# EAGLE board first (EAGLE 8.7.1)
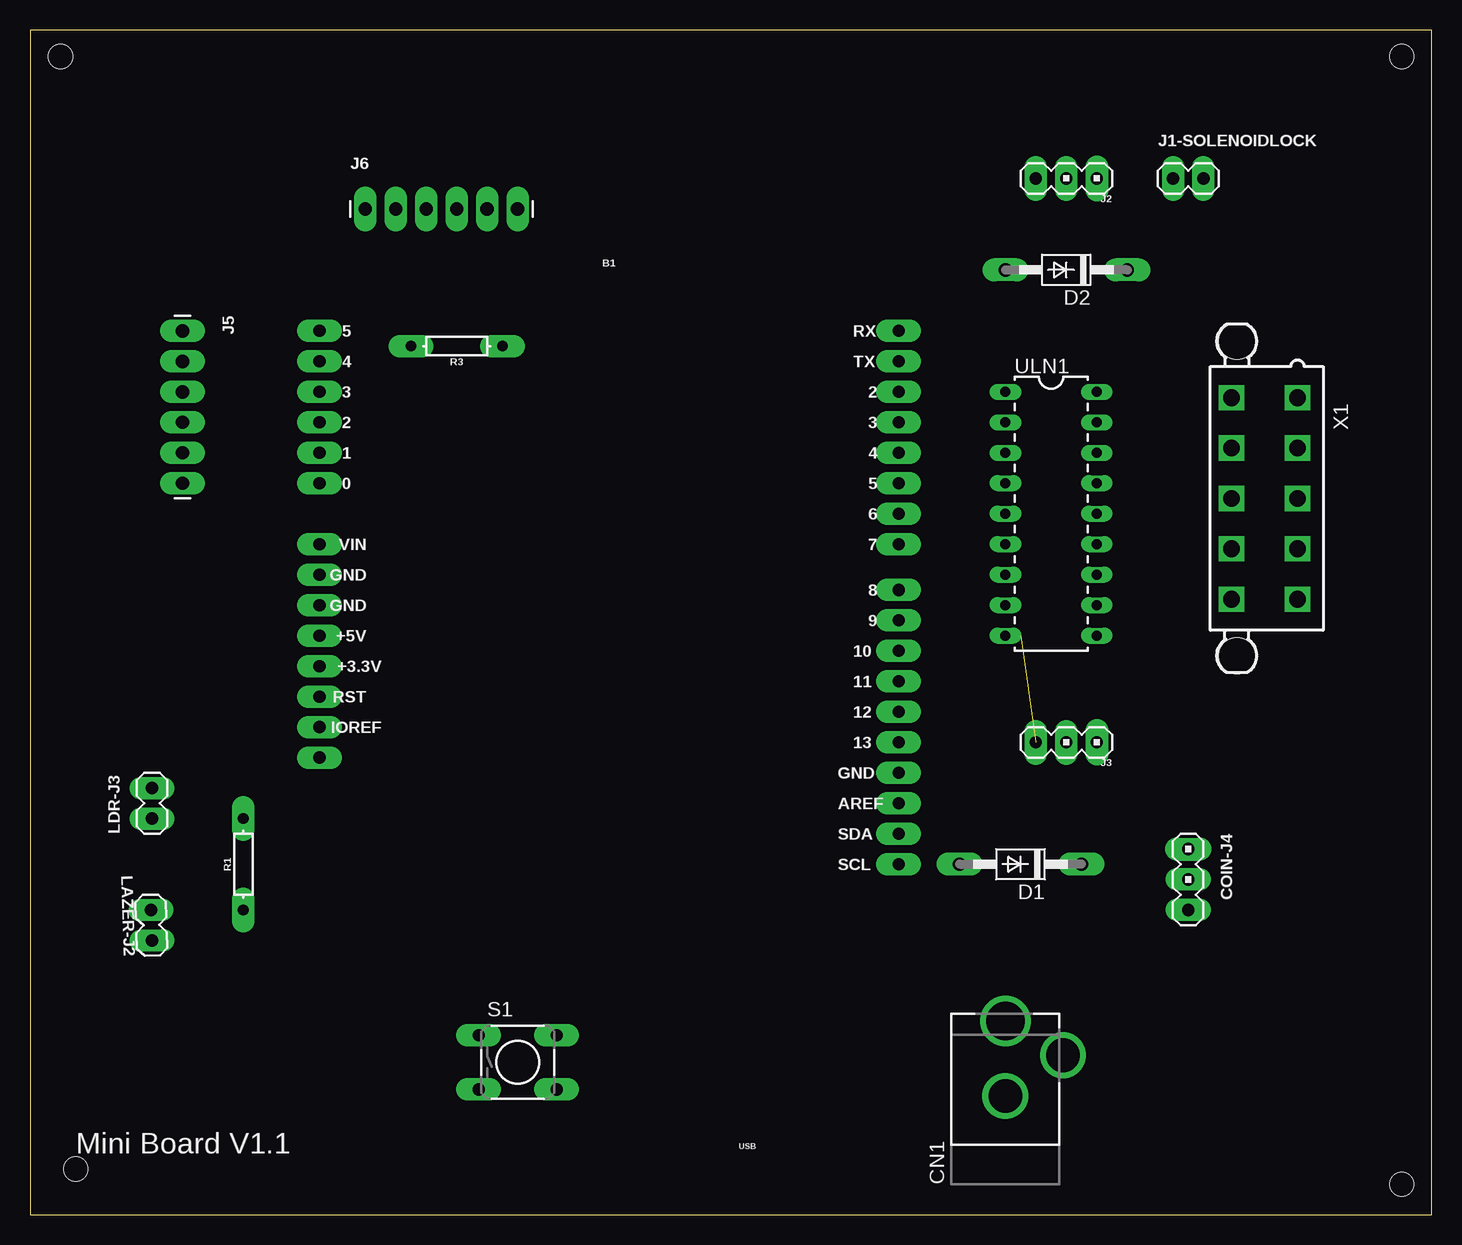
[diagram p0: board, top side]
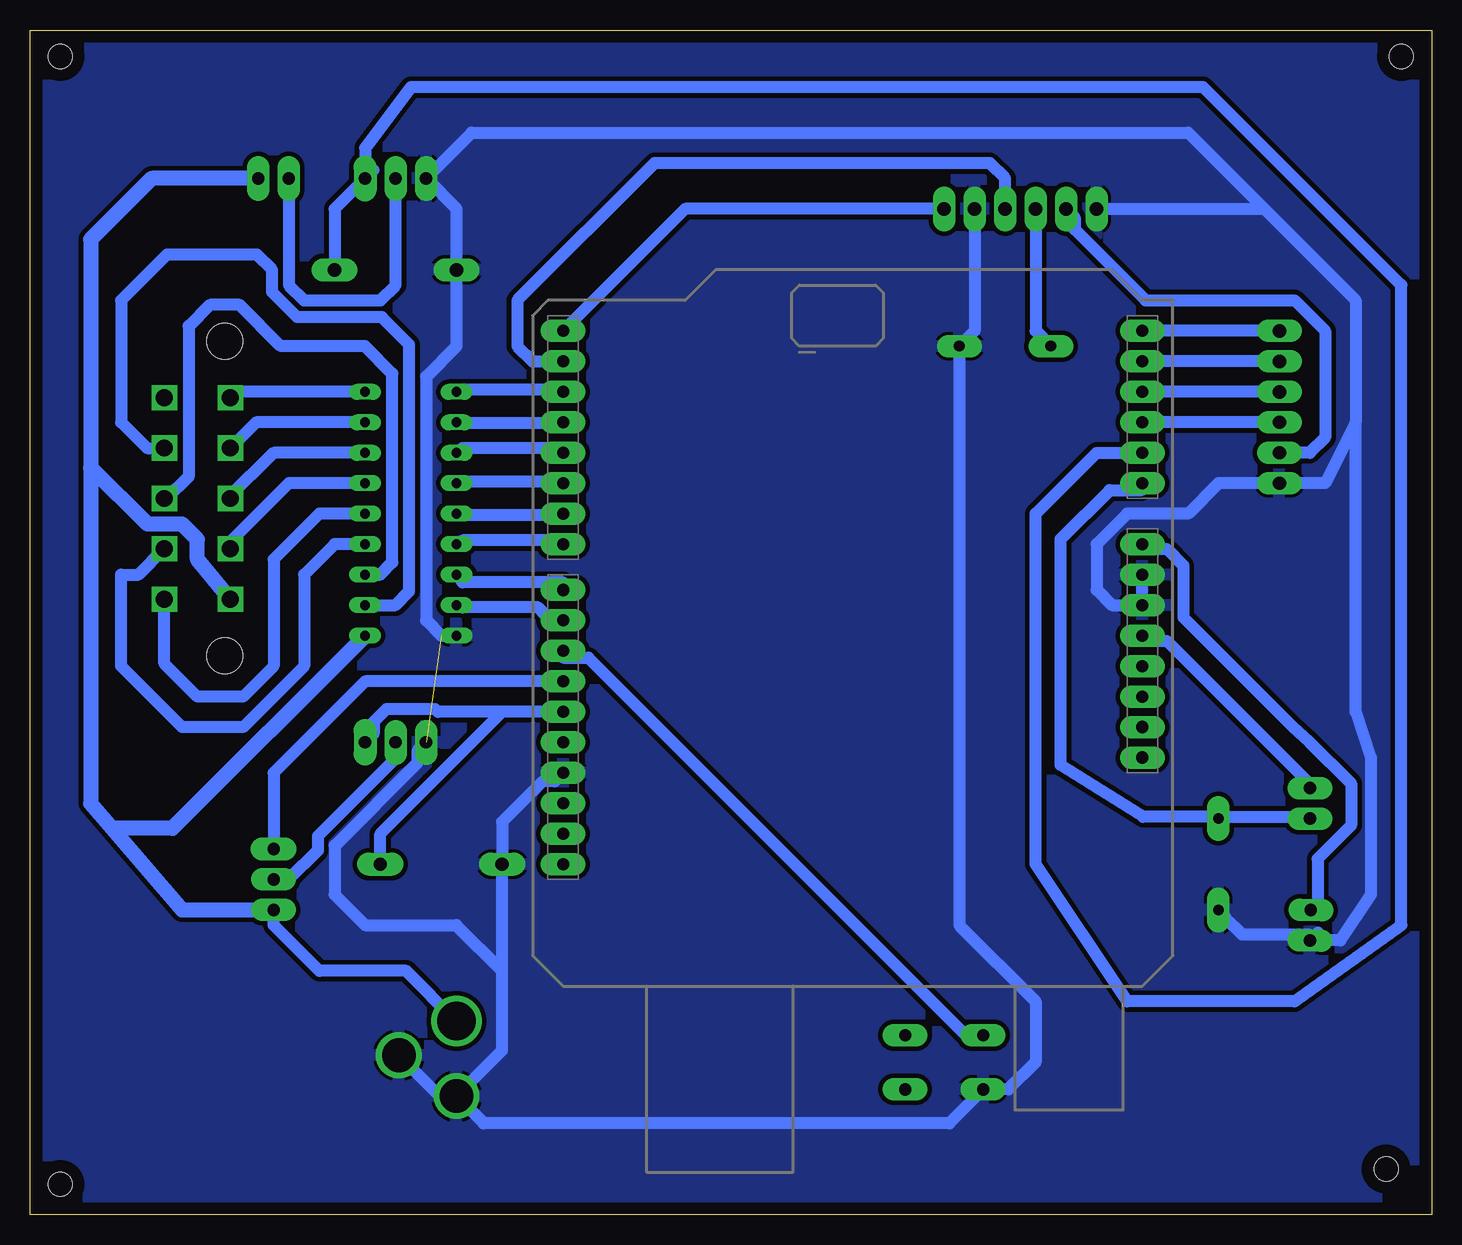
[diagram p1: board, bottom side, seen from below]

Size 116.82 x 98.73 mm. Coordinates in mm from the lower left corner, seen from the top.
Outline: 0,0 116.82,0 116.82,98.73 0,98.73 0,0
Copper layers (1*16): Top 0.035mm / dielectric 1.5mm / Bottom 0.035mm
Design rules "default *": minimum track width 6mil, minimum drill 0.35mm, track to track 15mil, track to pad 10mil, pad to pad 6mil, via to via 6mil, smd to smd 6mil, copper to edge 40mil, drill to drill 6mil, minimum pad ring 10mil, minimum via ring 8mil, stop-mask expansion 4mil, vias tented up to drill 0mil, thermal gap 10mil
Net classes: 0 default: width 1.016 mm, drill 0.508 mm, clearance 0.381 mm
Holes 2 mm at 3.81,3.81 114.3,2.54 114.3,96.52 2.54,96.52

## Footprints (pad centres in the part's own frame; a part is rotated, then mirrored left to right if it is on the bottom)
UNO_R3_SHIELD = drill 1.016 pad 1.88 long: 3.3V -24.13,-2.54; 5V -24.13,0; A0 -24.13,12.7; A1 -24.13,15.24; A2 -24.13,17.78; A3 -24.13,20.32; A4 -24.13,22.86; A5 -24.13,25.4; AREF 24.13,-13.97; D2 24.13,20.32; D3 24.13,17.78; D4 24.13,15.24; D5 24.13,12.7; D6 24.13,10.16; D7 24.13,7.62; D8 24.13,3.81; D9 24.13,1.27; D10 24.13,-1.27; D11 24.13,-3.81; D12 24.13,-6.35; D13 24.13,-8.89; GND@0 -24.13,2.54; GND@1 -24.13,5.08; GND@2 24.13,-11.43; IOREF -24.13,-7.62; NC -24.13,-10.16; RES -24.13,-5.08; RX 24.13,25.4; SCL 24.13,-19.05; SDA 24.13,-16.51; TX 24.13,22.86; VIN -24.13,7.62
DCJACK_2MM_PTH = drill 2.8: GND 0,7.35; GNDBREAK 4.8,10.75 | drill 3.2: PWR 0,13.6
1X03 = drill 1.016 pad 1.93 long: 1 -2.54,0 | drill 1.016 pad 1.88 long: 2 0,0; 3 2.54,0
DO41-10 = drill 1.118 pad 1.93 long: A 5.08,0; C -5.08,0
1X02 = drill 1.016 pad 1.88 long: 1 0,0; 2 2.54,0
1X06_LONGPADS = drill 1.118 pad 1.88 long: 1 0,0; 2 2.54,0; 3 5.08,0; 4 7.62,0; 5 10.16,0; 6 12.7,0
AXIAL-0.3 = drill 0.9 pad 1.88 long: P$1 -3.81,0; P$2 3.81,0
TACTILE-PTH = drill 1.016 pad 1.88 long: 1 -3.251,2.261; 2 3.251,2.261; 3 -3.251,-2.261; 4 3.251,-2.261
DIL18 = drill 0.813 long: 1 -10.16,-3.81; 2 -7.62,-3.81; 3 -5.08,-3.81; 4 -2.54,-3.81; 5 0,-3.81; 6 2.54,-3.81; 7 5.08,-3.81; 8 7.62,-3.81; 9 10.16,-3.81; 10 10.16,3.81; 11 7.62,3.81; 12 5.08,3.81; 13 2.54,3.81; 14 0,3.81; 15 -2.54,3.81; 16 -5.08,3.81; 17 -7.62,3.81; 18 -10.16,3.81
5566-10 = drill 1.4 square: 1 8.4,-2.75; 2 4.2,-2.75; 3 0,-2.75; 4 -4.2,-2.75; 5 -8.4,-2.75; 6 8.4,2.75; 7 4.2,2.75; 8 0,2.75; 9 -4.2,2.75; 10 -8.4,2.75 | hole 3: 13.1,2.29; -13.1,2.29

## Placement (x,y rotation side)
B1  ARDUINO_UNO_R3_SHIELDBASIC  [UNO_R3_SHIELD]  48.26,48.26 0 top
CN1  [DCJACK_2MM_PTH]  81.28,2.54 0 top
COIN-J4  455-1750-1-ND  [1X03]  96.52,27.94 270 top
D1  1N4004  [DO41-10]  82.55,29.21 180 top
D2  1N4004  [DO41-10]  86.36,78.74 180 top
J1-SOLENOIDLOCK  [1X02]  95.25,86.36 0 top
J2  455-1750-1-ND  [1X03]  86.36,86.36 180 top
J3  455-1750-1-ND  [1X03]  86.36,39.37 180 top
J5  [1X06_LONGPADS]  12.7,73.66 270 top
J6  [1X06_LONGPADS]  27.94,83.82 0 top
LAZER-J2  [1X02]  10.16,22.86 91.8 top
LDR-J3  [1X02]  10.16,33.02 90 top
R1  1k  [AXIAL-0.3]  17.78,29.21 90 top
R3  1k  [AXIAL-0.3]  35.56,72.39 180 top
S1  [TACTILE-PTH]  40.64,12.7 0 top
ULN1  [DIL18]  85.09,58.42 270 top
X1  5566-10  [5566-10]  102.87,59.69 90 top

## Library data of the parts
B1 = wendor; OC_NEWARK: unknown
CN1 = adafruit; OC_NEWARK: unknown
COIN-J4 J2 J3 = wendor; PROD_ID: XXX-00000
D1 D2 J5 J6 S1 = wendor
J1-SOLENOIDLOCK LAZER-J2 LDR-J3 = wendor; MPN: V23086C1001A403; OC_NEWARK: 86K0343
R1 R3 = wendor; MPN: CCF5510K0FKE36; OC_NEWARK: 71M1030; PROD_ID: RES-12182
ULN1 = SparkFun; MF: Arrow Electronics; MPN: ULN2804A; OC_NEWARK: 89K1144
X1 = con-molex; MF: MOLEX; OC_FARNELL: unknown; OC_NEWARK: unknown

## Nets
+12V: CN1.PWR COIN-J4.3 J1-SOLENOIDLOCK.2 ULN1.10 X1.10
GND: B1.GND@0 B1.GND@1 B1.GND@2 CN1.GND CN1.GNDBREAK D1.A D2.A J2.3 J3.3 J5.6 J6.1 J6.5 LAZER-J2.1 R1.P$1 R3.P$1 S1.3 ULN1.9
N$1: B1.D2 ULN1.1
N$2: B1.D3 ULN1.2
N$3: B1.D4 ULN1.3
N$4: B1.D5 ULN1.4
N$5: B1.D6 ULN1.5
N$6: B1.D7 ULN1.6
N$7: B1.D8 ULN1.7
N$8: B1.D9 ULN1.8
N$9: ULN1.18 X1.6
N$10: ULN1.17 X1.7
N$11: ULN1.16 X1.8
N$12: ULN1.15 X1.9
N$13: ULN1.14 X1.5
N$14: ULN1.13 X1.4
N$15: ULN1.12 X1.3
N$16: ULN1.11 X1.2
N$17: B1.A0 LDR-J3.1 R1.P$2
N$18: B1.VIN LAZER-J2.2
N$19: B1.D10 S1.1
N$20: COIN-J4.2 J3.2
N$21: B1.5V LDR-J3.2
N$22: B1.D11 COIN-J4.1
N$23: B1.D12 D1.C J3.1
N$24: B1.A1 D2.C J2.1
N$25: J1-SOLENOIDLOCK.1 J2.2
N$26: B1.TX J6.4
N$27: B1.RX J6.6
N$28: B1.A5 J5.1
N$29: B1.A4 J5.2
N$30: B1.A3 J5.3
N$31: B1.A2 J5.4
N$33: J5.5 J6.2
N$34: J6.3 R3.P$2

## Tracks (layer width: path | path; a pad name or v marks a point on that pad's centre or on a via)
+12V
  Bottom 1.016: CN1.PWR 85.46,20.32 92.71,20.32 96.52,24.13 COIN-J4.3
  Bottom 1.27: J1-SOLENOIDLOCK.2 106.68,86.36 111.76,81.28 111.76,62.23 | 111.76,62.23 111.76,34.29 109.97,32.2 | COIN-J4.3 104.14,25.4 109.97,32.2 | ULN1.10 104.96,32.2 109.97,32.2 | X1.10 102.87,54.61 102.87,56.28 104.15,57.56 107.02,57.56 111.7,62.23 111.76,62.23
GND  (1 unrouted)
  Bottom 1.016: 85.66,12.89 CN1.GNDBREAK 82.68,9.89 CN1.GND | B1.GND@1 24.19,52.71 24.19,51.31 B1.GND@0 26.67,50.8 27.94,52.07 27.94,55.88 25.4,58.42 20.32,58.42 17.78,60.96 J5.6 | LAZER-J2.1 10.22,23.37 15.81,23.37 17.21,24.76 R1.P$1 | ULN1.9 82.55,48.26 83.82,49.53 83.82,69.85 81.28,72.39 D2.A 81.28,83.82 J2.3 80.01,90.17 20.32,90.17 13.97,83.82 | CN1.GND 77.47,13.7 77.47,20.32 | 77.47,20.32 D1.A 77.47,32.74 74.09,36.12 73.1,36.12 B1.GND@2 | CN1.GND 79.01,7.62 40.21,7.62 S1.3 35.28,10.44 33.02,12.7 33.02,17.78 39.37,24.13 R3.P$1 38.1,73.66 J6.5 | J3.3 84.53,38.66 84.53,37.67 91.44,30.76 91.44,26.67 88.9,24.13 81.28,24.13 77.47,20.32 | J6.1 13.97,83.82 | 6.35,66.04 8.89,60.96 13.97,60.96 | 13.97,83.82 6.35,76.2 6.35,66.04 | 6.35,66.04 6.35,41.91 5.08,38.1 5.08,26.67 7.62,22.86 LAZER-J2.1 | LAZER-J2.1 9.5,23.52
  pour Bottom: 0,99.06 0,0 116.84,0 116.84,99.06
N$1
  Bottom 1.016: ULN1.1 80.77,68.77 72.39,68.77 B1.D2
N$2
  Bottom 1.016: ULN1.2 80.77,65.98 72.39,65.98 B1.D3
N$3
  Bottom 1.016: ULN1.3 80.77,63.88 72.39,63.88 B1.D4
N$4
  Bottom 1.016: ULN1.4 80.77,61.09 72.39,61.09 B1.D5
N$5
  Bottom 1.016: ULN1.5 80.77,58.29 72.39,58.29 B1.D6
N$6
  Bottom 1.016: ULN1.6 80.77,56.2 72.39,56.2 B1.D7
N$7
  Bottom 1.016: ULN1.7 80.77,52.71 72.39,52.71 B1.D8
N$8
  Bottom 1.016: ULN1.8 80.77,50.61 74.49,50.61 73.79,49.91 72.39,49.91 B1.D9
N$9
  Bottom 1.016: X1.6 99.63,68.58 ULN1.18
N$10
  Bottom 1.016: ULN1.17 97.97,66.04 X1.7
N$11
  Bottom 1.016: ULN1.16 96.52,63.5 100.33,59.69 X1.8
N$12
  Bottom 1.016: ULN1.15 95.25,60.96 100.12,56.09 X1.9
N$13
  Bottom 1.016: ULN1.14 92.71,58.42 96.52,54.61 96.52,45.72 99.06,43.18 102.87,43.18 105.62,45.93 X1.5
N$14
  Bottom 1.016: ULN1.13 91.44,55.88 93.98,53.34 93.98,45.72 99.06,40.64 104.14,40.64 109.22,45.72 109.22,53.34 107.77,53.34 X1.4
N$15
  Bottom 1.016: ULN1.12 87.63,53.34 86.61,54.36 86.61,70.1 88.9,72.39 95.9,72.39 99.33,75.81 101.83,75.81 103.6,74.04 103.6,61.5 105.41,59.69 X1.3
N$16
  Bottom 1.016: ULN1.11 86.36,50.8 85.22,51.94 85.22,72.52 87.5,74.8 93.98,74.8 94.51,74.8 94.56,74.8 96.65,76.89 96.65,78.74 97.92,80.01 105.41,80.01 109.22,76.2 109.22,66.04 107.07,63.89 X1.2
N$17
  Bottom 1.016: LDR-J3.1 10.22,33.15 17.21,33.15 R1.P$2 17.91,33.15 24.07,33.15 30.92,37.47 30.92,56.32 26.86,60.39 24.19,60.39 B1.A0
N$18
  Bottom 1.016: LAZER-J2.2 9.53,25.46 9.53,29.65 6.73,32.45 6.73,35.94 10.22,39.43 11.62,40.7 20.7,49.78 20.7,54.1 22.1,55.5 23.5,55.5 B1.VIN
N$19
  Bottom 1.016: S1.1 37.46,14.99 38.86,14.99 70.3,46.42 72.39,46.42 B1.D10
N$20
  Bottom 1.016: J3.2 86.36,38.04 92.84,31.56 92.84,30.35 95.25,27.94 COIN-J4.2
N$21
  Bottom 1.016: LDR-J3.2 10.22,35.94 22.1,47.82 23.5,47.82 B1.5V
N$22
  Bottom 1.016: 72.39,44.32 B1.D11 88.9,44.45 96.52,36.83 COIN-J4.1
N$23
  Bottom 1.016: B1.D12 77.47,41.91 | 77.47,41.91 82.83,41.91 83.06,42.14 87.12,42.14 88.19,41.07 88.19,40.08 J3.1 | D1.C 87.63,31.75 77.47,41.91
N$24
  Bottom 1.016: J2.1 91.44,83.82 D2.C | J2.1 88.19,87.07 | B1.A1 27.94,63.5 33.02,58.42 33.02,29.21 25.4,17.78 11.43,17.78 2.54,24.13 2.54,77.47 19.05,93.98 85.09,93.98 88.9,88.9 J2.1
N$25
  Bottom 1.016: J1-SOLENOIDLOCK.1 95.25,77.47 93.98,76.2 87.63,76.2 86.36,77.47 J2.2
N$26
  Bottom 1.016: J6.4 35.56,86.36 36.83,87.63 64.77,87.63 76.2,76.2 76.2,72.39 74.93,71.12 B1.TX
N$27
  Bottom 1.016: J6.6 62.23,83.82 B1.RX
N$28
  Bottom 1.016: J5.1 B1.A5
N$29
  Bottom 1.016: J5.2 B1.A4
N$30
  Bottom 1.016: J5.3 B1.A3
N$31
  Bottom 1.016: J5.4 B1.A2
N$33
  Bottom 1.016: J6.2 29.77,83.11 29.77,82.12 23.85,76.2 11.43,76.2 8.89,73.66 8.89,64.77 10.16,63.5 J5.5
N$34
  Bottom 1.016: J6.3 33.02,73.66 R3.P$2

## Text on the board
tPlace: Mini Board V1.1